# Altium PCB Relay off delay.PcbDoc
Units mm, origin at the board's own origin, x right, y up, seen from the top; angles counter-clockwise.
Board outline 152.4 x 101.6 mm, 2 copper layers (Top Layer, Bottom Layer); 62 components, 64 nets, 221 pads, 17 vias.
Unrouted connection lines stored in the file: 2.
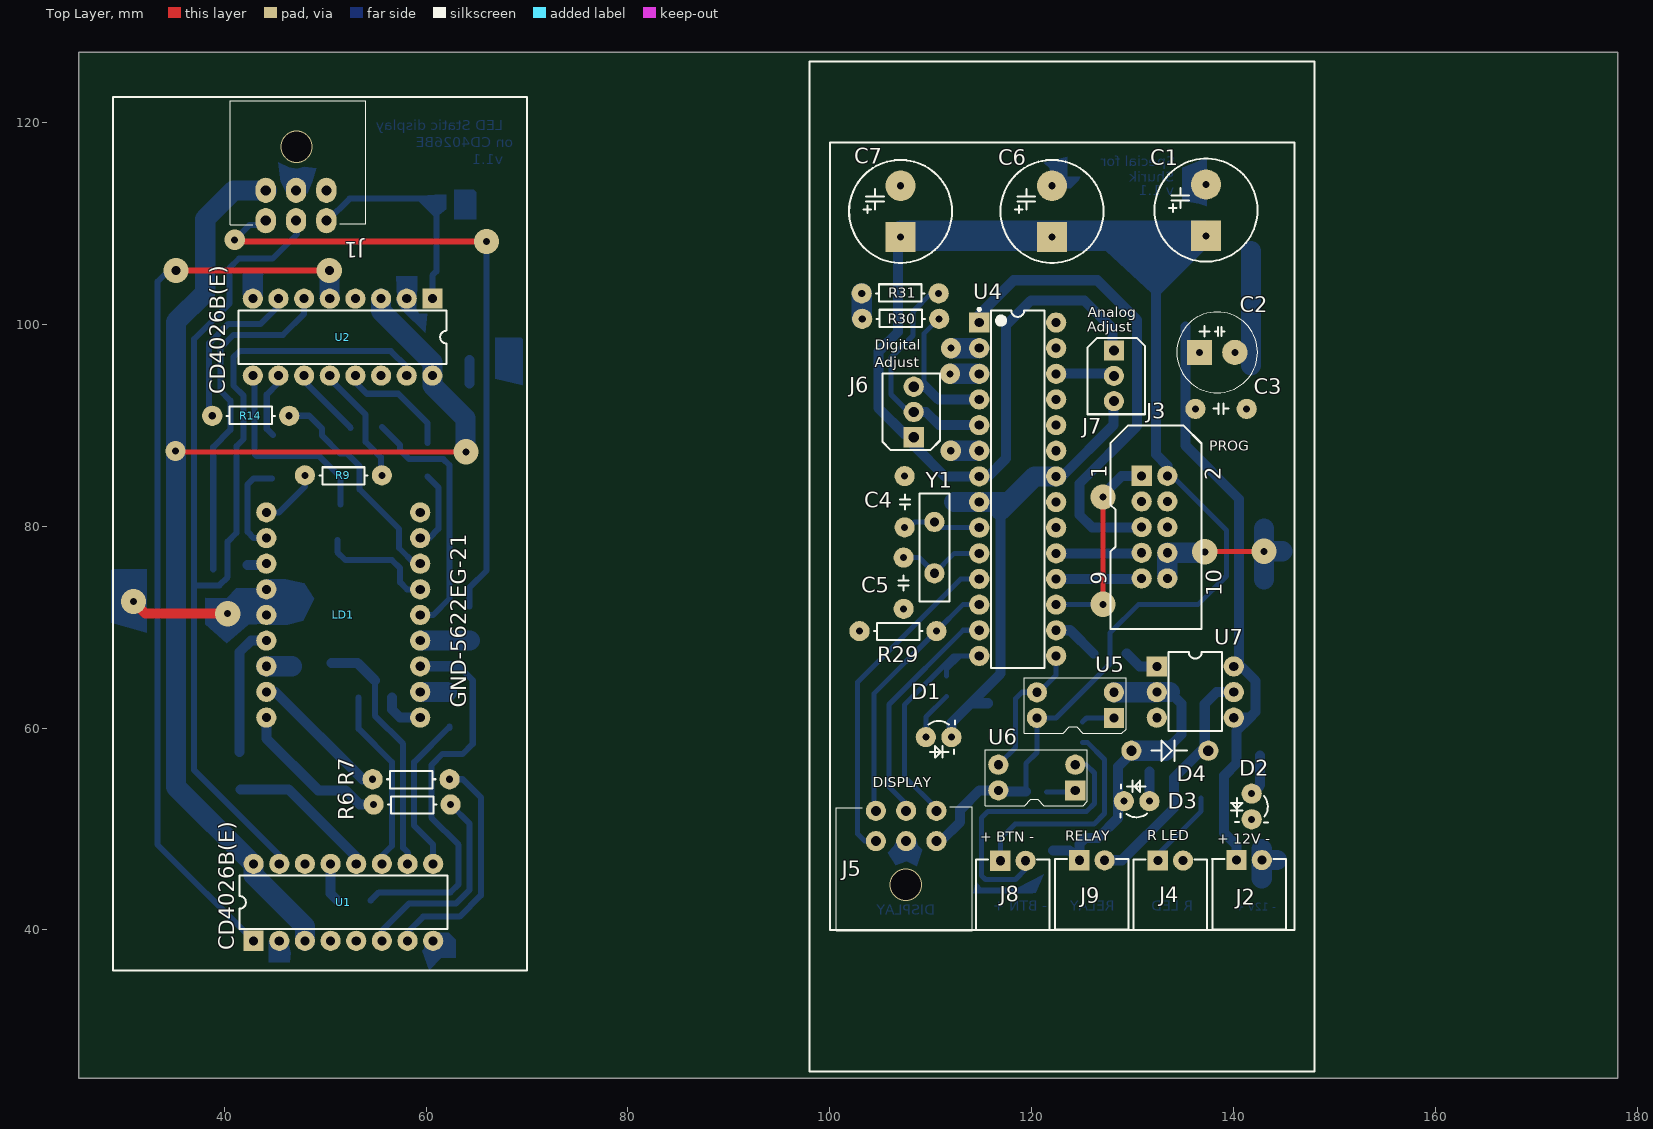
[diagram p0: Top Layer view]
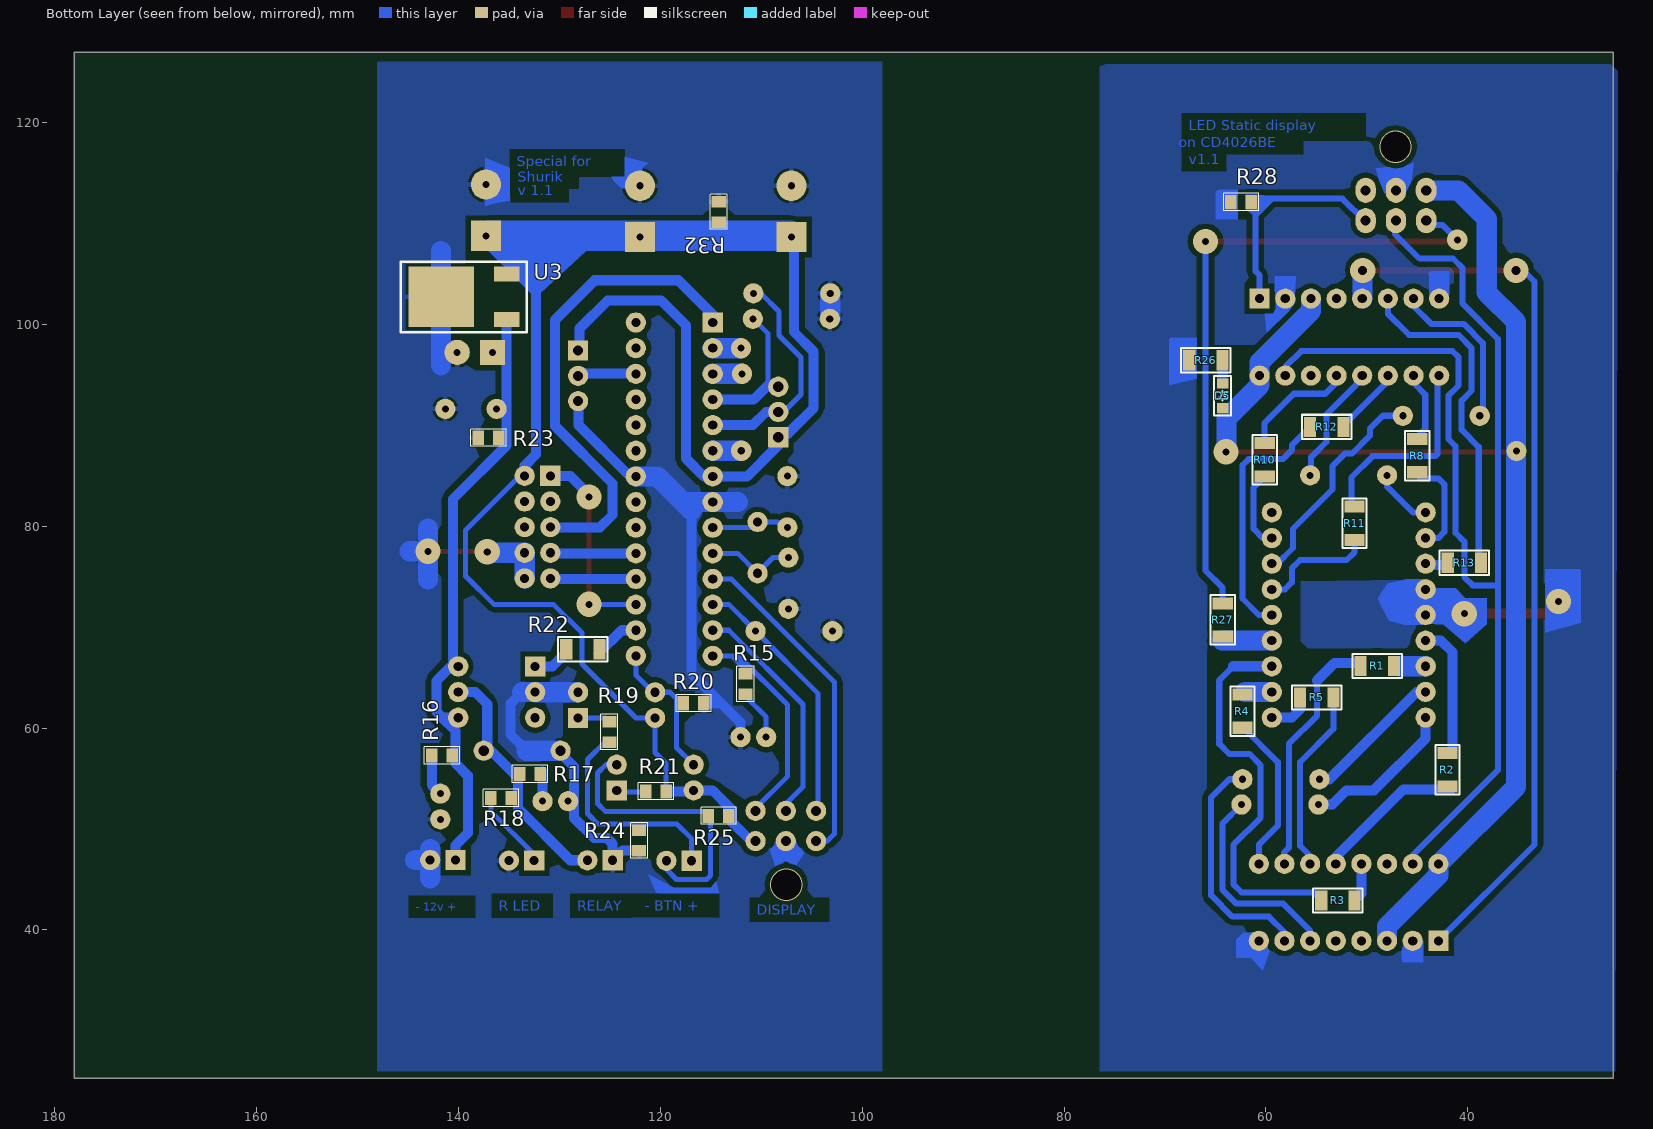
[diagram p1: Bottom Layer view, seen from below]
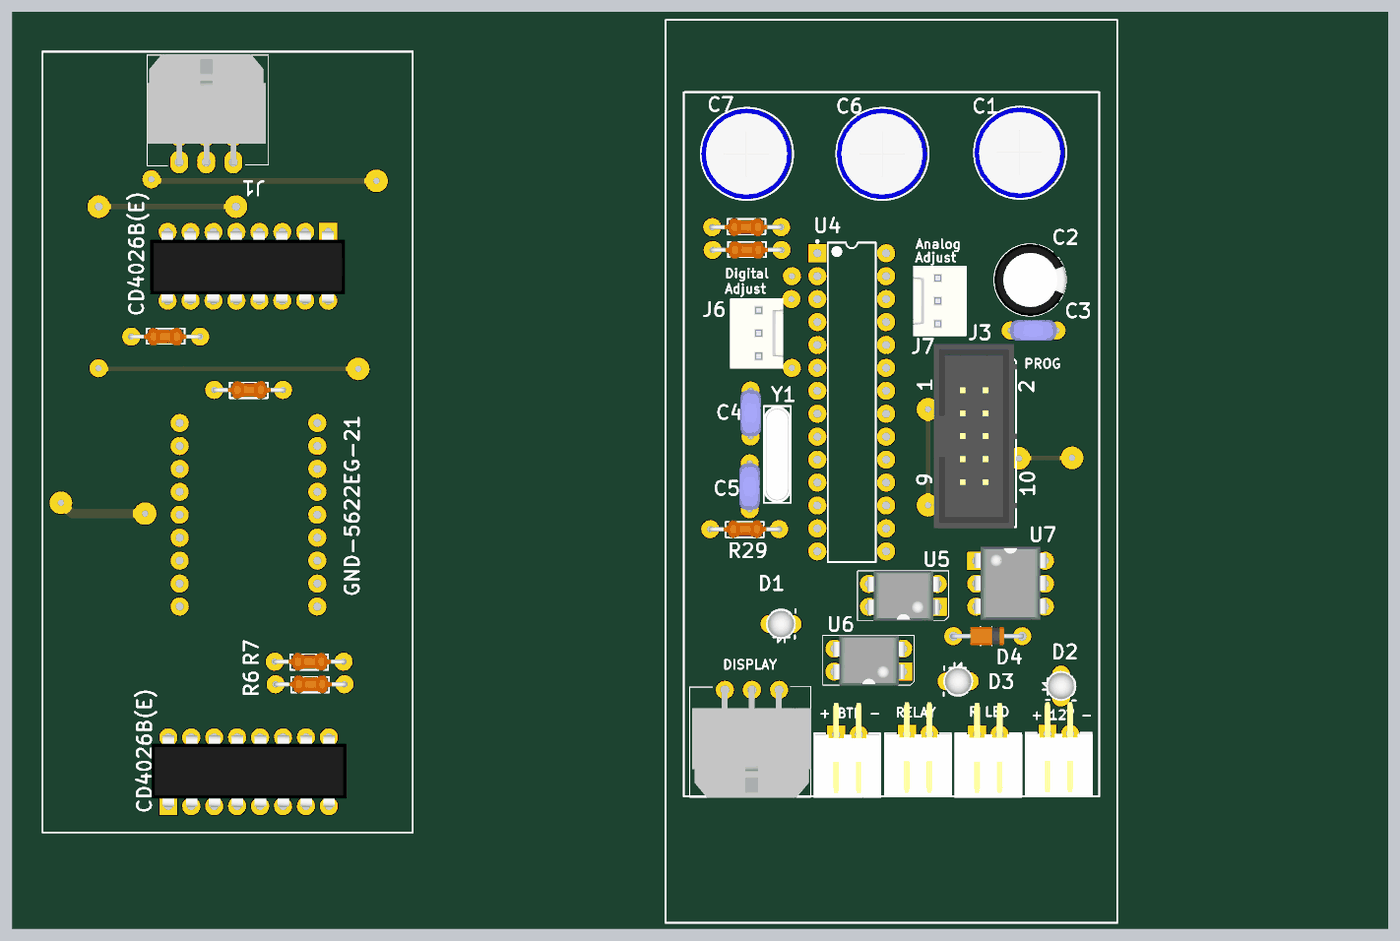
[diagram p2: 3D render of the assembled board from above, using the file's embedded part models]
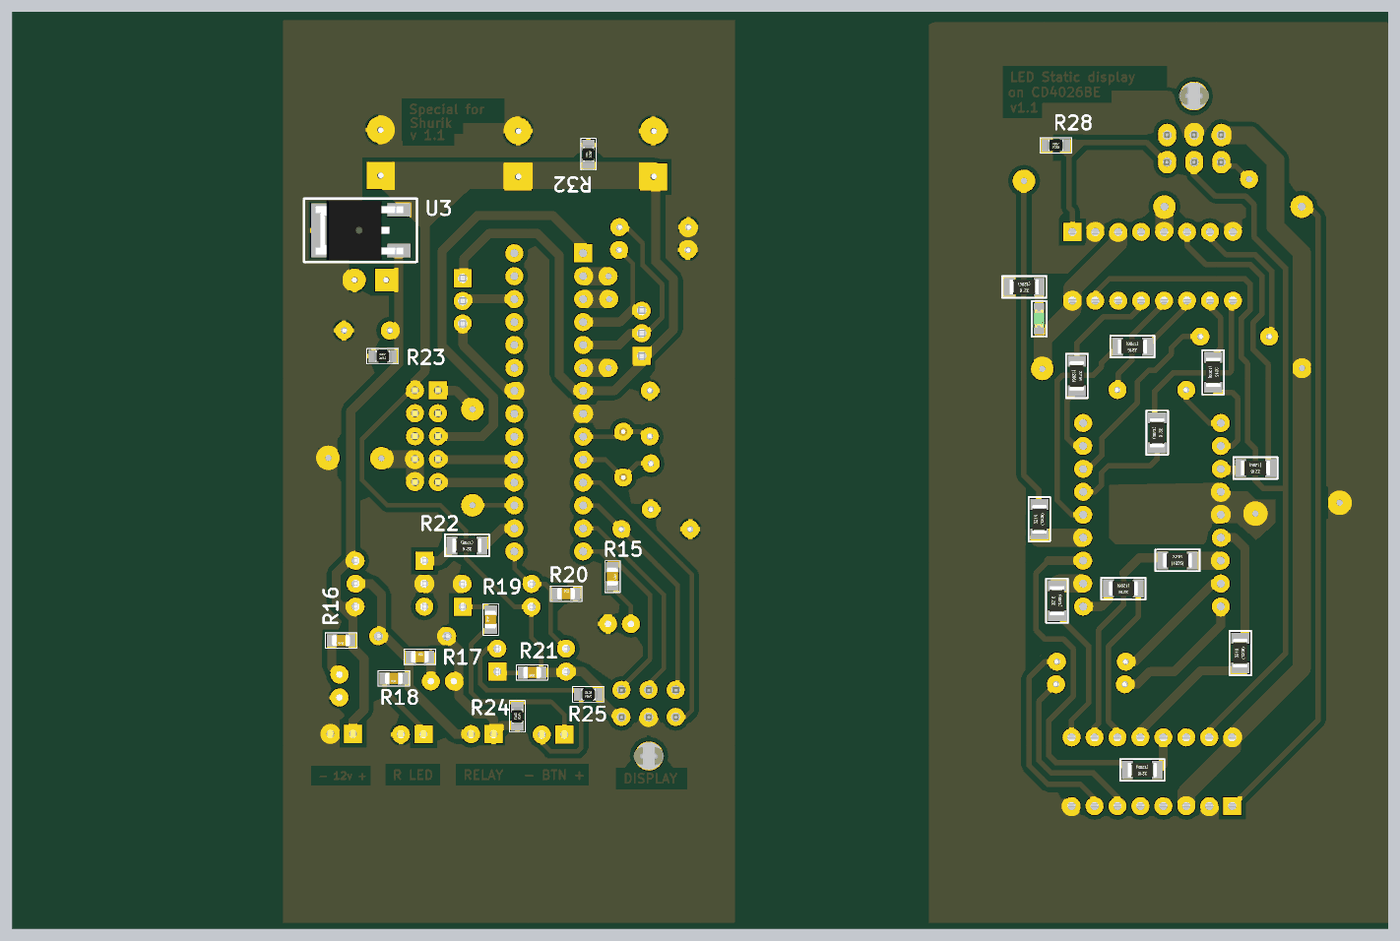
[diagram p3: 3D render of the assembled board from below, using the file's embedded part models]

## Layer stack, top to bottom
Top Solder: solder mask 0.0102, Solder Resist, Dk 3.5
Top Layer: signal copper 0.0356
Dielectric 1: dielectric 0.32, FR-4, Dk 4.8
Bottom Layer: signal copper 0.0356
Bottom Solder: solder mask 0.0102, Solder Resist, Dk 3.5

## Board outline
25.625,25.325 178.025,25.325 178.025,126.925 25.625,126.925

## Design rules (kind name [scope] priority, off if disabled: settings)
Clearance [All] p1: gap=0.5
PlaneClearance [All] p1: clearance=1
PlaneConnect [All] p1: planeconnectstyle=Relief reliefexpansion=0.5 reliefentries=4 reliefconductorwidth=0.5 reliefairgap=0.2
PolygonConnect [All] p1: connectstyle=Relief reliefconductorwidth=0.5 reliefentries=4 polygonreliefangle="90 Angle" airgapwidth=0.254
RoutingVias [All] p1: holewidth=0.9 width=2.54 viastyle="Through Hole" minholewidth=0.7 minwidth=1 maxholewidth=2 maxwidth=5
SolderMaskExpansion [All] p1: expansion=0.102
Width [All] p1: maxlimit=3 minlimit=0.5 preferedwidth=2
27 further rules are at their usual default settings.

## Classes and differential pairs
component class "Led 7 dig display": D5 J1 LD1 R1 R2 R3 R4 R5 R6 R7 R8 R9 R10 R11 R12 R13 R14 R26 R27 R28 U1 U2
component class "Relay off delay": C1 C2 C3 C4 C5 C6 C7 D1 D2 D3 D4 J2 J3 J4 J5 J6 J7 J8 J9 R15 R16 R17 R18 R19 R20 R21 R22 R23 R24 R25 R29 R30 R31 R32 U3 U4 U5 U6 U7 Y1

## Components (designator, comment, footprint, x,y, rotation, side; value= is the part's Value field where it differs from the comment)
C1 "1000mF 25V" "Cap E p5.08mm D10.2mm (3p)" 137.25,108.75 r90 top
C2 "470mF, 25V" "Cap E p3.5mm D8xH12" 136.6,97.2 r0 top
C3 "100nF" "Cap P5.08MM (3p) disk2" 136.2,91.6 r0 top
C4 "22 pF" "Cap P5.08MM (3p) disk2" 107.4,84.95 r270 top
C5 "22 pF" "Cap P5.08MM (3p) disk2" 107.3,71.8 r90 top
C6 "1000mF 25V" "Cap E p5.08mm D10.2mm (3p)" 122,108.625 r90 top
C7 "1000mF 25V" "Cap E p5.08mm D10.2mm (3p)" 107,108.625 r90 top
D1 "FYL-3014GD" "LED Round 3mm Green" 109.5,59.1 r0 top
D2 "FYL-3014" "LED Round 3mm Yellow" 141.775,53.5 r270 top
D3 "FYL-5013HD" "LED Round 3mm red" 131.65,52.75 r180 top
D4 "1N4004" "Diode DO-35" 129.855,57.75 r0 top
D5 "Green" "LED SMD 0805 Green" 64.3,91.7 r90 bottom
J1 "LED Display" "Molex Micro-Fit 3.0 - 6 pin D R"#1 44.125,113.25 r180 top
J2 "Power IN" "CWF-2 R" 142.775,46.925 r270 top
J3 "Connector" "LINE 2.54 x 10D (2 x 5) - BH" 130.875,84.975 r0 top
J4 "Relay LED" "CWF-2 R" 134.975,46.875 r270 top
J5 "LED Display" "Molex Micro-Fit 3.0 - 6 pin D R"#2 110.55,48.8 r0 top
J6 "Delay Btn" WF-3 108.3,88.8 r180 top
J7 "Delay Adj" WF-3 128.125,97.375 r0 top
J8 "Button" "CWF-2 R" 119.375,46.85 r270 top
J9 "Relay" "CWF-2 R" 127.2,46.9 r270 top
LD1 "GND-5622EG-21" GND-5622EG-21 44.183,61.034 r90 top
R1 ">145 Om" "SMD 1206 (3216)" 50.625,66.15 r180 bottom
R2 ">145 Om" "SMD 1206 (3216)" 42.025,54.225 r90 bottom
R3 ">145 Om" "SMD 1206 (3216)" 51.225,42.925 r0 bottom
R4 ">145 Om" "SMD 1206 (3216)" 62.325,60.025 r90 bottom
R5 ">145 Om" "SMD 1206 (3216)" 53.325,63.025 r0 bottom
R6 ">145 Om" "Res p7.62 (4p) 0.25w" 62.425,52.425 r180 top
R7 ">145 Om" "Res p7.62 (4p) 0.25w" 62.325,54.925 r180 top
R8 ">145 Om" "SMD 1206 (3216)" 45.025,88.625 r270 bottom
R9 ">145 Om" "Res p7.62 (4p) 0.25w" 55.625,85.025 r180 top
R10 ">145 Om" "SMD 1206 (3216)" 60.125,88.225 r270 bottom
R11 ">145 Om" "SMD 1206 (3216)" 51.225,81.925 r270 bottom
R12 ">145 Om" "SMD 1206 (3216)" 52.325,89.825 r0 bottom
R13 ">145 Om" "SMD 1206 (3216)" 38.7,76.375 r0 bottom
R14 ">145 Om" "Res p7.62 (4p) 0.25w" 38.825,90.925 r0 top
R15 "1.5 kOm" "SMD 0805 (2012)" 111.575,65.375 r270 bottom
R16 "1 kOm" "SMD 0805 (2012)" 140.575,57.3 r0 bottom
R17 "1 kOm" "SMD 0805 (2012)" 133.9,55.425 r180 bottom
R18 "560 Om" "SMD 0805 (2012)" 134.725,53.1 r0 bottom
R19 "560 Om" "SMD 0805 (2012)" 125,58.575 r90 bottom
R20 "10 KOm" "SMD 0805 (2012)" 117.7,62.425 r180 bottom
R21 "220 Om" "SMD 0805 (2012)" 119.4,53.75 r0 bottom
R22 "330Om" "SMD 1206 (3216)" 126,67.8 r0 bottom
R23 "10 kOm" "SMD 0805 (2012)" 138.016,88.725 r180 bottom
R24 "10 kOm" "SMD 0805 (2012)" 122.1,49.9 r270 bottom
R25 "10 kOm" "SMD 0805 (2012)" 113.175,51.325 r0 bottom
R26 "330 Om" "SMD 1206 (3216)" 64.3,96.425 r0 bottom
R27 ">145 Om" "SMD 1206 (3216)" 64.275,69.05 r90 bottom
R28 "10 kOm" "SMD 0805 (2012)" 61.425,112.125 r0 bottom
R29 "10 kOm" "Res p7.62 (4p) 0.25w" 110.55,69.6 r180 top
R30 "10 kOm" "Res p7.62 (4p) 0.25w" 103.2,100.525 r0 top
R31 "10 kOm" "Res p7.62 (4p) 0.25w" 103.15,103.05 r0 top
R32 "10 kOm" "SMD 0805 (2012)" 114.225,112.15 r270 bottom
U1 "CD4026B(E)" DIP-16 42.925,38.925 r0 top
U2 "CD4026B(E)" DIP-16 60.625,102.525 r180 top
U3 "7805C" D-PAK 141.7,102.7 r180 bottom
U4 "ATmega8A-PU" 28P3 118.6,83.65 r0 top
U5 "Optocouplier" DIP-4 128.125,61 r180 top
U6 "Optocouplier" DIP-4 124.3,53.825 r180 top
U7 "PVT412L" DIP-6 132.375,66.1 r270 top
Y1 "12 MHz" "XTAL - 2" 110.35,75.325 r90 top

## Footprints (in the part's own frame and the unit in brackets; to place one, negate y for a bottom-side part, rotate by r counter-clockwise, add the part's x,y. Pads: shape width x height; smd on the part's side, far side on the other; paste and mask are expansions set on the pad)
28P3 [mm] "DIP, 28-Leads, Row Spacing 7.62mm, Pitch 2.54mm, Body 34.67x7.3mm"
  rect 2x2 hole 0.9: 1(-3.81,16.51)
  round 2 hole 0.9: 2(-3.81,13.97) 3(-3.81,11.43) 4(-3.81,8.89) 5(-3.81,6.35) 6(-3.81,3.81) 7(-3.81,1.27) 8(-3.81,-1.27) 9(-3.81,-3.81) 10(-3.81,-6.35) 11(-3.81,-8.89) 12(-3.81,-11.43) 13(-3.81,-13.97) 14(-3.81,-16.51) 15(3.81,-16.51) 16(3.81,-13.97) 17(3.81,-11.43) 18(3.81,-8.89) 19(3.81,-6.35) 20(3.81,-3.81) 21(3.81,-1.27) 22(3.81,1.27) 23(3.81,3.81) 24(3.81,6.35) 25(3.81,8.89) 26(3.81,11.43) 27(3.81,13.97) 28(3.81,16.51)
  silkscreen extent -3.93,-17.7 2.65,17.93, body extent -3.6,-17.65 3.6,17.65, height 4.58
"Cap E p3.5mm D8xH12" [mm] "D 8mm; H 12mm"
  rect 2.5x2.5 hole 0.7: 1(0,0)
  round 2.5 hole 0.7: 2(3.5,0)
  silkscreen extent -2.25,-4 5.75,4, body extent -2.22,-4 5.75,4, height 12.31
"Cap E p5.08mm D10.2mm (3p)" [mm] "D 10.2mm; H 17.5mm, Hole: 0.7mm"
  rect 3x3 hole 0.7: 1(0,0)
  round 3 hole 0.7: 2(5.08,0)
  silkscreen extent -2.56,-5.1 7.64,5.1, body extent -2.49,-4.97 7.57,5.08, height 16.53
"Cap P5.08MM (3p) disk2" [mm]
  round 2 hole 0.7: 1(0,0) 2(5.08,0)
  silkscreen extent 1.8,-0.48 3.3,0.53, body extent -0.29,-1.12 5.29,1.16, height 6.04
"CWF-2 R" [mm]
  rect 2x2 hole 0.9: 1(0,-2.5)
  round 2 hole 0.9: 2(0,0)
  silkscreen extent -0.13,-4.92 6.88,2.38, body extent -3.5,-5 7,2.5, height 5.8
D-PAK [mm]
  rect 2.54x1.5 smd: 1(6.5,-2.25) 3(6.5,2.25)
  rect 6.48x5.97 smd: 2(0,0)
  silkscreen extent -4,-3.5 8.5,3.5, body extent -2.7,-3.29 7,3.29, height 2.3
"Diode DO-35" [mm] "p7.62mm"
  round 2 hole 1: A(0,0) K(7.62,0)
  silkscreen extent 2,-1 5.5,1, body extent -0.32,-1 7.82,1.02, height 2.21
DIP-4 [mm]
  rect 2x2 hole 0.9: 1(0,0)
  round 2 hole 0.9: 2(0,-2.54) 3(7.62,0) 4(7.62,-2.54)
  silkscreen extent -1.2,-4 8.9,1.5, body extent -0.2,-4 7.8,1.54, height 4.31
DIP-6 [mm] "DIP; 6 Leads; Row Spacing 7.62 mm; Pitch 2.54 mm"
  rect 2x2 hole 0.9: 1(0,0)
  round 2 hole 0.9: 2(2.54,0) 3(5.08,0) 4(5.08,7.62) 5(2.54,7.62) 6(0,7.62)
  silkscreen extent -1.41,1.16 6.4,6.46, body extent -1.54,-0.2 6.54,7.8, height 4.31
DIP-16 [mm] "DIP; 16 Leads; Row Spacing 7.62 mm; Pitch 2.54 mm"
  rect 2x2 hole 0.9: 1(0,0)
  round 2 hole 0.9: 2(2.54,0) 3(5.08,0) 4(7.62,0) 5(10.16,0) 6(12.7,0) 7(15.24,0) 8(17.78,0) 9(17.78,7.62) 10(15.24,7.62) 11(12.7,7.62) 12(10.16,7.62) 13(7.62,7.62) 14(5.08,7.62) 15(2.54,7.62) 16(0,7.62)
  silkscreen extent -1.41,1.16 19.19,6.46, body extent -1.87,-0.05 19.72,7.83, height 4.19
GND-5622EG-21 [mm] "7 Seg, 2 Digits, Static, GND"
  round 2 hole 0.9: A(5.08,0) A1(17.78,0) B(7.62,0) B1(20.32,0) C(5.08,-15.24) C1(17.78,-15.24) D(2.54,-15.24) D1(12.7,-15.24) DP(7.62,-15.24) DP1(20.32,-15.24) E(0,-15.24) E1(10.16,-15.24) F(0,0) F1(15.24,0) G(2.54,0) G1(15.24,-15.24) GND(10.16,0) GND(12.7,0)
  body extent -2.37,-16.16 22.62,0.86, height 8
"LED Round 3mm Green" [mm]
  round 2 hole 0.7: A(0,0) K(2.54,0)
  silkscreen extent 0.25,-2.03 2.88,1.63, body extent -0.39,-1.65 2.91,1.64, height 5.51
"LED Round 3mm red" [mm]
  round 2 hole 0.7: A(0,0) K(2.54,0)
  silkscreen extent 0.25,-2.03 2.88,1.63, body extent -0.39,-1.65 2.91,1.64, height 5.51
"LED Round 3mm Yellow" [mm]
  round 2 hole 0.7: A(0,0) K(2.54,0)
  silkscreen extent 0.25,-2.03 2.88,1.63, body extent -0.39,-1.65 2.91,1.64, height 5.51
"LED SMD 0805 Green" [mm]
  rect 1x1.143 smd: A(0,0) K(2.425,0)
  silkscreen extent -0.75,-0.82 3.17,0.83, body extent 0.22,-0.62 2.24,0.63, height 1.1
"LINE 2.54 x 10D (2 x 5) - BH" [mm]
  rect 2x2 hole 0.9: 1(0,0)
  round 2 hole 0.9: 2(2.54,0) 3(0,-2.54) 4(2.54,-2.54) 5(0,-5.08) 6(2.54,-5.08) 7(0,-7.62) 8(2.54,-7.62) 9(0,-10.16) 10(2.54,-10.16)
  silkscreen extent -3.1,-15.15 5.92,5, body extent -3.17,-15.25 6.03,5.1, height 8.84
"Molex Micro-Fit 3.0 - 6 pin D R"#1 [mm]
  oval 2x2.5 hole 1: 1(0,0) 2(-3,0) 3(-6,0) 4(0,3) 5(-3,3) 6(-6,3)
  silkscreen extent -9.9,-8.87 3.52,3.4, body extent -9.6,-8.94 3.55,3.3, height 8.83
"Molex Micro-Fit 3.0 - 6 pin D R"#2 [mm]
  round 2 hole 1: 1(0,0) 2(-3,0) 3(-6,0) 4(0,3) 5(-3,3) 6(-6,3)
  silkscreen extent -9.9,-8.87 3.52,3.4, body extent -9.6,-8.94 3.55,3.3, height 8.83
"Res p7.62 (4p) 0.25w" [mm] "L p7.62; horisontal"
  round 2 hole 0.7: 1(0,0) 2(7.62,0)
  silkscreen extent 1.4,-0.8 6.2,0.9, body extent -0.3,-1 7.8,1, height 2.1
"SMD 0805 (2012)" [mil]
  rect 45x55 smd: 1(0.35,0.98) 2(80.35,0.98)
  silkscreen extent -29,-32 109,34, body extent 1,-24 80,26, height 31
"SMD 1206 (3216)" [mm]
  rect 1.2x2 smd: 1(0,0) 2(3.3,0)
  silkscreen extent -0.8,-1.2 4.1,1.2, body extent 0.05,-0.8 3.25,0.8, height 0.55
WF-3 [mm]
  rect 2x2 hole 1: 1(0,0)
  round 2 hole 1: 2(0,-2.5) 3(0,-5)
  silkscreen extent -2.6,-6.3 3.1,1.27, body extent -2.7,-6.4 3.2,1.4, height 11.73
"XTAL - 2" [mm]
  round 2 hole 0.9: 1(0,0) 2(5.08,0)
  silkscreen extent -2.8,-1.5 7.9,1.5, body extent -2.79,-1.52 7.87,1.52, height 3.09

## Part data
C1 C6 C7: library part "Cap E 1000mF x 25V", "Capacitor"
C2: library part "Cap E 470mF x 25V", "Capacitor"
C3 C4 C5: library part "Cap Ceramic", "Capacitor"
D1: library part "Led Round 3mm Green", "2.1v 10mA, 15-30mCd"
D2: library part "Led Round 3mm Orange", "2.1v 10mA, 30mCd"
D3: library part "Led Round 3mm Red", "2.25v 10mA, 5mCd"
D4: library part "Diode 1N4004", "1 Amp General Purpose Rectifier"
D5: library part "Led SMD 0805 Green", "?2v ?20mA"
J1 J5: library part "Micro-Fit 6R (2x3)", "Horisontal, Dbl line, Male - 3mm"
J2 J4 J8 J9: library part "CWF-2 (R)", "CWF series"
J3: library part "PLD-10 (2 x 5)", "Vert, Dbl line, Male"
J6 J7: library part WF-3, "Standart Fan MB's Connector"
LD1: library part "7 Seg GND-5622EG-21", "Green, Common Catode 2 Digits"
R1 R2 R3 R4 R5 R6 R7 R8 R9 R10 R11 R12 R13 R14 R22 R23 R24 R25 R26 R28 R29 R30 R31 R32: library part "Res All Types"
R15 R16 R17 R18 R19 R20 R21: library part "Res SMD 0805"
R27: library part "Res SMD 1206"
U1 U2: library part CD4026BE, "jk Trigger"
U3: "Voltage Regulator"
U4: "8-bit AVR Microcontroller, 8KB Flash, 512 Bytes EEPROM, 1KB SRAM, 28-pin PDIP, Industrial Grade (-40°C to 85°C)"
U5 U6: library part "Optocouplier LTV 817B"
U7: library part "Opto Rlay PVT412L", "Opto relay 2 chanel, MOSFET"
Y1: library part XTAL, "Crystal Oscillator"

## Via types
v1: diameter 2.5, hole 0.7, Top Layer to Bottom Layer, 8 vias
v2: diameter 2, hole 0.7, Top Layer to Bottom Layer, 5 vias
v3: diameter 2.5, hole 0.9, Top Layer to Bottom Layer, 2 vias
v4: diameter 3.2, hole 3, Top Layer to Bottom Layer, 2 vias

## Nets (pads, with @x,y where several pads share a name; then routed paths per layer and width w, separated by ;. In a path a pad name is that pad's centre, name@x,y a point inside that pad or via, vN(x,y) a via of type N, cw(c..) or ccw(c..) an arc to the next point about the centre after c; other vN are vias at no path point)
+5V: C1.1 C6.1 C7.1 D5.A J1.1 J3.2 J5.1 J6.1 J7.1 R21.1 R25.1 R32.2 U1.3 U1.16 U2.3 U2.16 U3.3 U4.7 U5.3 U6.3 | length 309.7
  Top Layer w0.5: v2(35.2,87.425) 35.125,87.35 v1(63.95,87.35)
  Bottom Layer w0.5: R21.1 119.409,56.484 120.505,57.58 U5.3 122.4,61 127.75,66.35 127.75,69.425 130.575,72.25 136.475,72.25 139.275,75.05 139.275,79.575 133.875,84.975 J3.2
  Bottom Layer w1: C7.1@106.1,108.525 106.75,107.875 106.75,99.225 104.8,97.275 104.8,91.7 107.45,89.05 J6.1@108.3,89.05 ; J6.1 108.3,88 111.38,84.92 U4.7 115.67,84.92 117.425,86.675 117.425,99.875 119.9,102.35 125.2,102.35 128,99.55 128,97.95 J7.1@128.3,97.65 ; J5.1@110.1,48.8 111,48.8 112.9,50.7 112.9,51.9 114.825,53.825 U6.3 ; U6.3@116.78,53.725 R21.1 ; J3.2 133.415,85.985 132.3,87.1 132.3,103.2 137,107.9 C1.1@137,108.75
  Bottom Layer w2: J1.1@44.225,113.225 40.925,113.225 38.125,110.425 38.125,103.125 35.225,100.225 35.225,54.179 42.859,46.545 U1.16 42.925,45.425 48.005,40.345 U1.3 ; U2.3@55.531,102.525 55.531,101.319 60.625,96.225 U2.16 60.625,93.95 63.9,90.675 v1@63.9,87.725
  Bottom Layer w3: C7.1@107.125,108.75 C1.1@137,108.75
+12V: C2.1 C3.1 J2.1 R16.1 R23.2 U3.1 U7.4 U7.6 | length 60.3
  Bottom Layer w1: U3.1@135.2,99.75 135.2,88 140.525,82.675 140.525,66.1 U7.6 140.725,66.1 142.15,64.675 142.15,61.6 141.57,61.02 U7.4 ; J2.1 140.275,48.375 139.05,49.6 139.05,55.281 140.275,56.506 140.275,59.7 141.595,61.02
"BUTTON SW": R20.1 U4.15 U5.4 U6.4 | length 14.3
  Bottom Layer w0.5: U6.4@116.78,56.19 116.78,56.455 118.4,58.075 118.4,62.925 119.015,63.54 U5.4 120.715,63.54 122.395,65.22 122.395,67.125 U4.15
"CLOCK TO SECOND": U1.1 U2.5 | length 91.3
  Top Layer w0.6: v3@35.325,105.325 50.525,105.325 v3@50.625,106.125
  Bottom Layer w0.6: v3(35.225,105.325) 35.225,106.025 33.4,104.2 33.4,48.45 U1.1
  Bottom Layer w2: U2.5@50.425,102.565 v3(50.425,105.325)
"CPU RESET": J3.5 U4.1 | length 47.3
  Bottom Layer w1: U4.1 114.79,100.94 118.2,104.35 126.475,104.35 130.4,100.425 130.4,89.9 124.725,84.225 124.725,81.1 125.955,79.87 J3.5@130.375,79.87
DELAYDECBTN: J6.2 R31.2 U4.5 | length 22.4
  Bottom Layer w0.5: J6.2 107.775,91.3 106.05,93.025 106.05,96.7 108.225,98.875 108.225,101.25 110.025,103.05 R31.2
  Bottom Layer w1: J6.2 109.525,91.3 110.825,90 U4.5
DELAYINCBTN: J6.3 R30.2 U4.4 | length 14.5
  Bottom Layer w0.5: 109.3,93.975 109.3,99.05 R30.2@110.798,100.548
  Bottom Layer w1: J6.3 109.475,93.8 ; 109.3,93.975 110.735,92.54 U4.4
GND: C1.2 C2.2 C3.2 C4.1 C5.1 C6.2 C7.2 D1.K D2.K D3.K D4.A J1.2 J2.2 J3.8 J3.10 J4.2 J5.2 J7.3 J9.1 LD1.GND R20.2 R23.1 R24.2 R26.2 R28.2 R29.2 R30.1 R31.1 R32.1 U1.2 U1.8 U2.2 U2.8 U3.2 U4.8 U4.22 U5.2 U7.2 | length 128.1
  Top Layer w0.5: v1@137.175,77.5 v1(143,77.5)
  Top Layer w1: v1(31.025,72.525) 32.225,71.325 v1(40.35,71.325)
  Bottom Layer w0.5: U4.22 U4.22@122.995,84.92 ; J7.3@128.1,92.37 J7.3@128.3,92.57
  Bottom Layer w1: J5.2@107.55,48.722 J5.2 ; D1.K 112.04,60.525 116.9,65.385 116.9,81.55 ; 114.325,62.45 R20.2 ; R24.2 123.741,47.859 J9.1 124.7,48.525 125.275,49.1 126.55,49.1 128.55,51.1 128.55,56.195 D4.A@130.105,57.75 ; U4.22@122.995,84.92 128.1,90.025 J7.3@128.1,92.37 ; U7.2@132.355,63.54 U7.2 ; 133.225,57.75 134.825,59.35 134.825,62.4 133.665,63.56
  Bottom Layer w2: R30.1@103.15,100.575 R31.1 ; 112.32,82.38 U4.8 117.73,82.38 ; 116.9,81.55 120.27,84.92 U4.22 ; U5.2 U7.2@132.355,63.54 ; D4.A@130.105,57.75 133.225,57.75 ; U7.2 133.665,63.56 ; J3.10 J3.8 v1@137.125,77.355 ; 141.7,95.925 141.7,107.25 ; 142.775,45.125 J2.2 ; 142.775,48 J2.2 ; 143,74.7 v1(143,77.5) ; 143,79.75 v1(143,77.5) ; 144.275,46.925 J2.2 ; 144.825,77.5 v1(143,77.5)
  other v1: 137.125,77.45
"LED CLOCK IN": J1.6 R28.1 U2.1 | length 20.8
  Bottom Layer w0.6: J1.6@50.225,110.225 52.425,112.425 59.425,112.425 61.025,110.825 61.025,105.225 60.625,104.825 U2.1
"LED CLOCK OUT": J5.6 R29.1 U4.12 | length 25.8
  Bottom Layer w0.5: J5.6 104.35,52 104.35,63.4 R29.1 113.17,72.22 U4.12
"LED RESET IN": J1.5 U1.15 U2.15 | length 118.8
  Bottom Layer w0.6: 37.025,74.125 39.525,74.125 40.35,74.95 40.35,78.45 41.225,79.325 41.225,87.925 41.925,88.625 41.925,92.925 40.925,93.925 40.925,96.725 41.525,97.325 56.525,97.325 58.085,95.765 U2.15 ; U1.15 45.465,47.385 37.025,55.825 37.025,98.525 40.525,102.025 40.525,105.55 41.475,106.5 44.8,106.5 47.225,108.925 J1.5@47.225,110.225
"LED RESET OUT": J5.5 U4.13 | length 23.2
  Bottom Layer w0.5: J5.5 107.55,52.475 105.85,54.175 105.85,62.325 113.205,69.68 U4.13
MISO: J3.9 U4.18 | length 8.5
  Bottom Layer w1: U4.18 J3.9@130.875,74.76
MOSI: J3.1 U4.17 | length 20.2
  Top Layer w0.5: v1(127.05,72.25) v1(127.05,82.875)
  Bottom Layer w0.5: U4.17@122.44,72.25 v1(127.05,72.25)
  Bottom Layer w1: v1@126.775,82.825 128.9,84.95 J3.1@130.875,84.95
NetC4_2: C4.2 U4.9 Y1.2 | length 7.9
  Bottom Layer w0.5: C4.2@107.48,79.5 108.385,80.405 Y1.2 110.915,79.84 U4.9
NetC5_2: C5.2 U4.10 Y1.1 | length 9
  Bottom Layer w0.5: C5.2 108.82,76.88 110.35,75.35 Y1.1 112.325,77.3 U4.10
NetD1_A: D1.A R15.2 | length 4.8
  Bottom Layer w0.5: D1.A 109.5,61.084 R15.2@111.525,63.109
NetD2_A: D2.A R16.2 | length 4.1
  Bottom Layer w1: D2.A 142.616,54.341 R16.2
NetD3_A: D3.A R17.2 | length 3
  Bottom Layer w1: D3.A R17.2@131.65,55.7
NetD5_K: D5.K R26.1 | length 2.3
  Bottom Layer w1: D5.K R26.1
NetJ4_1: J4.1 R18.2 | length 8
  Bottom Layer w0.5: J4.1 132.475,47.475 136.766,51.766 R18.2
NetJ8_1: J8.1 R19.1 R24.1 | length 22
  Bottom Layer w0.5: J8.1@116.659,46.85 J8.1 116.875,49.025 118.325,50.475 126.148,50.475 127.2,51.527 127.2,56.875 125.491,58.584 R19.1
NetJ8_2: J8.2 R25.2 U6.2 | length 28.5
  Bottom Layer w0.5: J8.2 119.375,46 118.375,45 115.4,45 115,45.4 115,51.084 R25.2 115.666,51.75 125.425,51.75 126.2,52.525 126.2,55.55 125.385,56.365 U6.2
NetLD1_A: LD1.A R1.2 | length 2.5
  Bottom Layer w2: LD1.A 46.714,66.114
NetLD1_A1: LD1.A1 R8.2 | length 9.5
  Bottom Layer w0.6: LD1.A1 42.936,78.814 42.325,79.425 42.325,84.125 42.925,84.725 R8.2@44.725,84.725
NetLD1_B: LD1.B R2.2 | length 13
  Bottom Layer w1: R2.2@41.525,57.625 41.525,67.525 42.654,68.654 LD1.B
NetLD1_B1: LD1.B1 R9.2 | length 6
  Bottom Layer w0.6: LD1.B1 45.454,81.354 48.005,83.905 R9.2
NetLD1_C: LD1.C R3.2 | length 39.3
  Bottom Layer w0.6: R3.2 55.325,43.725 62.425,43.725 63.225,44.525 63.225,48.425 60.525,51.125 60.525,56.325 61.625,57.425 63.625,57.425 64.625,58.425 64.625,64.725 63.236,66.114
  Bottom Layer w1: LD1.C 63.236,66.114
NetLD1_C1: LD1.C1 R10.2 | length 7.8
  Bottom Layer w0.6: LD1.C1 60.314,78.814 61.225,79.725 61.225,83.825 R10.2
NetLD1_D: LD1.D R4.2 | length 2.7
  Bottom Layer w2: LD1.D R4.2@62.076,63.574
NetLD1_D1: LD1.D1 R11.2 | length 11.7
  Bottom Layer w0.6: R11.2 51.225,77.425 52.025,76.625 56.625,76.625 57.425,75.825 57.425,74.425 58.116,73.734 LD1.D1
NetLD1_DP: LD1.DP R27.1 | length 4.9
  Bottom Layer w2: LD1.DP R27.1@64.325,68.654
NetLD1_E: LD1.E R5.2 | length 4.6
  Bottom Layer w1: R5.2 56.625,61.825 57.416,61.034 LD1.E LD1.E@59.214,60.825
NetLD1_E1: LD1.E1 R12.2 | length 25.3
  Bottom Layer w0.6: R12.2 57.425,88.025 57.425,87.525 58.325,86.625 61.725,86.625 62.325,86.025 62.325,72.825 60.694,71.194 LD1.E1
NetLD1_F: LD1.F R6.2 | length 15.4
  Bottom Layer w1: LD1.F 44.183,58.967 49.325,53.825 52.025,53.825 53.425,52.425 R6.2
NetLD1_F1: LD1.F1 R13.2 | length 2.4
  Bottom Layer w0.6: LD1.F1@43.425,76.125 LD1.F1@43.825,76.525 ; LD1.F1@43.476,76.274 LD1.F1
  Bottom Layer w1: R13.2@42.325,76.125 LD1.F1@43.425,76.125
NetLD1_G: LD1.G R7.2 | length 14.1
  Bottom Layer w1: LD1.G 45.076,63.574 53.725,54.925 R7.2
NetLD1_G1: LD1.G1 R14.2 | length 21.9
  Bottom Layer w0.6: R14.2 48.425,90.925 49.675,89.675 49.675,88.975 51.475,87.175 52.175,87.175 53.425,85.925 53.425,83.625 57.325,79.725 57.325,77.825 58.876,76.274 LD1.G1
NetR1_1: R1.1 U1.10 | length 24.1
  Bottom Layer w0.6: 54.925,64.725 54.925,61.225 57.725,58.425 57.725,48.125 58.225,47.625 U1.10@58.225,47.025
  Bottom Layer w1: R1.1@50.625,66.425 53.225,66.425 54.925,64.725
NetR2_1: R2.1 U1.12 | length 14.9
  Bottom Layer w1: R2.1@41.625,53.925 46.375,53.925 53.085,47.215 U1.12
NetR3_1: R3.1 U1.13 | length 3.9
  Bottom Layer w1: U1.13 50.545,43.605 R3.1
NetR4_1: R4.1 U1.9 | length 15.9
  Bottom Layer w0.6: U1.9 60.705,46.605 60.705,48.445 58.825,50.325 58.825,56.625 62.325,60.125 R4.1
NetR5_1: R5.1 U1.11 | length 18.3
  Bottom Layer w0.6: R5.1 53.325,59.925 56.625,56.625 56.625,48.325 55.625,47.325 U1.11
NetR6_1: R6.1 U1.6 | length 20.6
  Bottom Layer w0.6: U1.6 55.625,39.925 58.325,42.625 62.981,42.625 64.325,43.969 64.325,50.525 R6.1
NetR7_1: R7.1 U1.7 | length 23.2
  Bottom Layer w0.6: U1.7 58.165,39.765 59.725,41.325 63.325,41.325 65.425,43.425 65.425,53.125 63.625,54.925 R7.1
NetR8_1: R8.1 U2.10 | length 6.6
  Bottom Layer w0.6: R8.1@44.825,89.025 44.225,89.625 44.225,93.025 45.385,94.185 U2.10
NetR9_1: R9.1 U2.12 | length 12
  Bottom Layer w0.6: U2.12 50.465,94.585 54.025,91.025 54.025,88.325 55.525,86.825 R9.1@55.525,85.025
NetR10_1: R10.1 U2.13 | length 11.4
  Bottom Layer w0.6: U2.13 53.005,94.245 54.145,93.105 57.245,93.105 58.49,91.86 60.125,90.225 R10.1
NetR11_1: R11.1 U2.9 | length 20
  Bottom Layer w0.6: U2.9 42.825,94.885 43.025,94.685 43.025,87.125 43.225,86.925 49.425,86.925 51.525,84.825 R11.1@51.525,82.125
NetR12_1: R12.1 U2.11 | length 7.1
  Bottom Layer w0.6: U2.11 47.925,94.325 R12.1@52.525,89.725
NetR13_1: R13.1 U2.6 | length 34.2
  Bottom Layer w0.6: R13.1@38.925,75.725 38.925,87.825 40.625,89.525 40.625,92.425 39.625,93.425 39.625,97.625 40.925,98.925 45.825,98.925 47.925,101.025 U2.6
NetR14_1: R14.1 U2.7 | length 16.1
  Bottom Layer w0.6: R14.1@38.525,91.125 38.525,98.125 40.425,100.025 43.625,100.025 45.385,101.785 U2.7
NetR19_2: R19.2 U5.1 | length 3.3
  Bottom Layer w0.5: R19.2 125.409,61 U5.1
NetR21_2: R21.2 U6.1 | length 3
  Bottom Layer w0.5: R21.2@121.441,53.65 U6.1@124.425,53.65
NetR22_2: R22.2 U7.1 | length 3.5
  Bottom Layer w1: R22.2@129.4,67.375 130.675,66.1 U7.1
PD5: J5.3 U4.11 | length 33.4
  Bottom Layer w0.5: J5.3 103.45,48.8 102.75,49.5 102.75,64.55 112.96,74.76 U4.11
"POWER LED": J5.4 R15.1 U4.14 | length 23.8
  Bottom Layer w0.5: J5.4 110.55,52.05 107.375,55.225 107.375,62.275 112.24,67.14 112.875,67.14 ; R15.1@111.525,65.141 111.525,65.79 112.875,67.14 ; U4.14 112.875,67.14
"POWER LED IN": J1.4 R27.2 | length 66.7
  Top Layer w0.6: v2(41.05,108.35) 41.225,108.175 v1(65.975,108.175)
  Bottom Layer w0.6: v2(41.05,108.35) 42.535,109.835 43.835,109.835 J1.4@44.225,110.225 ; R27.2@64.325,72.025 64.325,73.925 66,75.6 66,108.6 v1@66.325,108.925
RELAY: R22.1 U4.16 | length 4.6
  Bottom Layer w1: U4.16 123.795,69.68 R22.1@126.1,67.375
"RELAY ON": D4.K J9.2 R17.1 R18.1 U7.5 | length 25
  Bottom Layer w1: J9.2 128.9,46.9 134.075,52.075 134.075,55.075 136.75,57.75 137.725,57.75 137.125,58.35 137.125,62.375 138.31,63.56 U7.5
RXD: J3.6
SCK: J3.7 U4.19 | length 8.5
  Bottom Layer w1: U4.19 J3.7@130.875,77.3
"TIME ADJ": J7.2 U4.26 | length 5.9
  Bottom Layer w0.5: U4.26 U4.26@122.44,95.11
  Bottom Layer w1: U4.26@122.44,95.11 J7.2@128.3,95.11
TXD: J3.4
pads on no net: J1.3 J3.3 LD1.DP1 U1.4 U1.5 U1.14 U2.4 U2.14 U4.2 U4.3 U4.6 U4.20 U4.21 U4.23 U4.24 U4.25 U4.27 U4.28 U7.3
copper on no net: | length 8.5
  Bottom Layer w2: v2(111.905,95.08) 114.79,95.08 ; v2(111.968,87.46) 114.79,87.46 ; v2(111.98,97.62) 114.79,97.62
  other v4: 107.5,44.475 47.175,117.575

## Polygon pours and split planes (outlines as drawn)
GND on Bottom Layer "Top Layer-No Net" (solid): 148,126 98,126 98,26 148,26
GND on Bottom Layer "Top Layer-No Net" (solid, pour order 4): 25.389,26 76.485,26 76.485,126.28 77.059,126.8 75.911,125.761 25.159,125.761

## Other copper
Bottom Layer:
  region net GND: 134.9,115.482 134.9,112.2 136.6,111.9 137.3,111.7 137.3,116.5
  region net GND: 123.503,116.583 123.503,115.103 123.5,115.1 123.5,114.6 124.8,114.575 124.666,114.266 123.855,113.455 121.75,113.455 121.75,115.45 121.2,116
  region net GND: 120.4,43.7 120.1,43.625 114.2,43.625 114.426,44.826 115,44.2 118.6,44.2 121.2,45.5
  pour cut-out: 113.325,102.475 114.675,102.475 118.525,106.325 118.3,106.55 110.3,106.55
  region net +5V: 131.875,103.075 137.625,108.6 126.05,108.45
  region net GND: 106.7,49.1 106.3,48.3 105.75,47.646 106.5,46.4 107.6,46.8 108.6,46.3 109.137,47.965 108.7,48.4 108.5,49.1
  region net "LED CLOCK IN": 59.5,112.7 60.875,112.8 62,112.8 62,111.4 61.325,110.85
  region net GND: 62.775,110.375 62.775,113.3 64.725,113.3 64.975,113.05 64.975,110.375
  pour cut-out: 61.9,110.375 62.775,110.375 62.775,113.3 59.434,113.3 59.425,113.291
  pour cut-out: 65.825,67.625 65.825,53.95 64.1,55.675 63.905,55.675 63.905,56.505 65.491,58.091 65.491,65.084 64.345,66.229 64.635,66.52 64.635,67.186
  region net GND: 57.1,102.475 57.1,102.175 57.675,101.325 59.9,99.125 60.125,101.025 59.294,101.025 59.05,101.575 59.05,102.7
  pour cut-out: 63.2,97.925 61,97.925 61.9,97.025 61.9,95.525 62.725,94.7 63.175,94.7
  region net GND: 66.875,94.575 66.875,98.675 69.45,98.675 69.6,98.525 69.575,98.5 69.575,93.925
  region net GND: 48.712,114.085 48.225,112.925 46.225,112.95 45.611,114.101 45.35,116.025 46.412,115.551 47.175,115.375 47.944,115.572 49.125,115.45
  pour cut-out: 45.075,74.725 45.724,80.6 48.142,82.817 49.725,84.325 49.725,80.825 53.325,81.925 54.425,81.325 55.225,80.625 56.488,79.182 56.34,77.405 52.725,77.525 52.725,79.725 49.725,79.725 49.525,75.85 56,75.725 56.6,74.525
  pour cut-out: 45.875,67.925 46.301,67.65 51.725,67.65 51.807,67.425 53.725,67.425 56.625,64.525 57.62,64.525 58.025,66.925 57.894,72.906 56.813,73.813 56.559,75.466 56.55,67.9
  pour cut-out: 54.5,56.765 54.356,56.62 53.56,56.62 47.925,62.675 48.05,63.525 48.55,64.4 48.5,64.425 48.425,67.925 49.525,67.925 49.525,64.925 52.225,64.925 52.225,59.825
  pour cut-out: 61.425,69.625 65.825,69.625 65.825,71.225 61.425,71.225
  region net GND: 28.825,70.425 28.825,75.625 28.925,75.725 32.325,75.725 32.325,69.425
  region net GND: 41.825,102.925 41.825,105.225 43.625,105.225 43.925,104.925 43.825,104.825 43.825,102.525
  region net GND: 57.125,102.625 57.025,104.725 59.125,104.725 59.125,103.47 59.025,102.525
  region net GND: 59.625,37.925 59.825,38.125 59.825,39.125 60.425,39.725 62.225,39.725 62.925,39.025 62.925,37.225 61.525,37.225 60.325,36.025
  region net GND: 44.425,38.925 44.425,36.825 46.525,36.825 46.625,37.725 46.425,38.525 46.225,39.225
  region net GND: 44.125,70.225 44.125,70.325 42.375,70.25 40.25,68.4 38.125,70.275 38.15,72.9 40.25,72.875 41.225,73.825 43.125,73.825 44.025,74.725 46.125,74.725 47.925,74.325 48.925,72.825 47.825,70.625 46.325,70.225
  text "LED Static display" at 67.65,119.2 h1
  text "on CD4026BE" at 68.65,117.525 h1
  text "v1.1" at 67.65,115.825 h1
  text "Special for" at 134.2,115.625 h1
  text "Shurik" at 134.1,114.1 h1
  text "v 1.1" at 134.1,112.775 h1
  text "- BTN +" at 121.525,41.9 h1
  text "RELAY" at 128.2,41.9 h1
  text "R LED" at 136,41.9 h1
  text "- 12v +" at 144.2,41.9 h0.8
  text "DISPLAY" at 110.45,41.5 h1

## Silkscreen, mask and mechanical layers (free items; w line width, h text height)
Top Overlay:
  lines w0.2: 29,36 70,36 70,122.5 29,122.5 29,36 ; 98,26 148,26 148,126 98,126 98,26 ; 100,40 100,118 146,118 146,40 100,40
  text "Analog" at 125.55,100.7 h1
  text "Adjust" at 125.5,99.225 h1
  text "Digital" at 104.425,97.45 h1
  text "Adjust" at 104.425,95.75 h1
  text "PROG" at 137.575,87.45 h1
  text "DISPLAY" at 104.225,54.125 h1
  text "R LED" at 131.45,48.9 h1
  text "RELAY" at 123.325,48.825 h1
  text "+ BTN -" at 114.875,48.75 h1
  text "+ 12V -" at 138.35,48.55 h1

## Text inside footprints (layer, text, board x,y; h text height)
J3: Top Overlay "1" at 127.425,84.725 h1.52 r90; Top Overlay "2" at 138.7,84.525 h1.52 r90; Top Overlay "9" at 127.4,74.2 h1.52 r90; Top Overlay "10" at 138.8,73.05 h1.52 r90